# Altium PCB pcb.PcbDoc
Units mm, origin at the board's own origin, x right, y up, seen from the top; angles counter-clockwise.
Board outline 76.66 x 27.36 mm, 2 copper layers (Top Layer, Bottom Layer), stack 0.981 mm thick; 45 components, 12 nets, 110 pads, 470 vias.
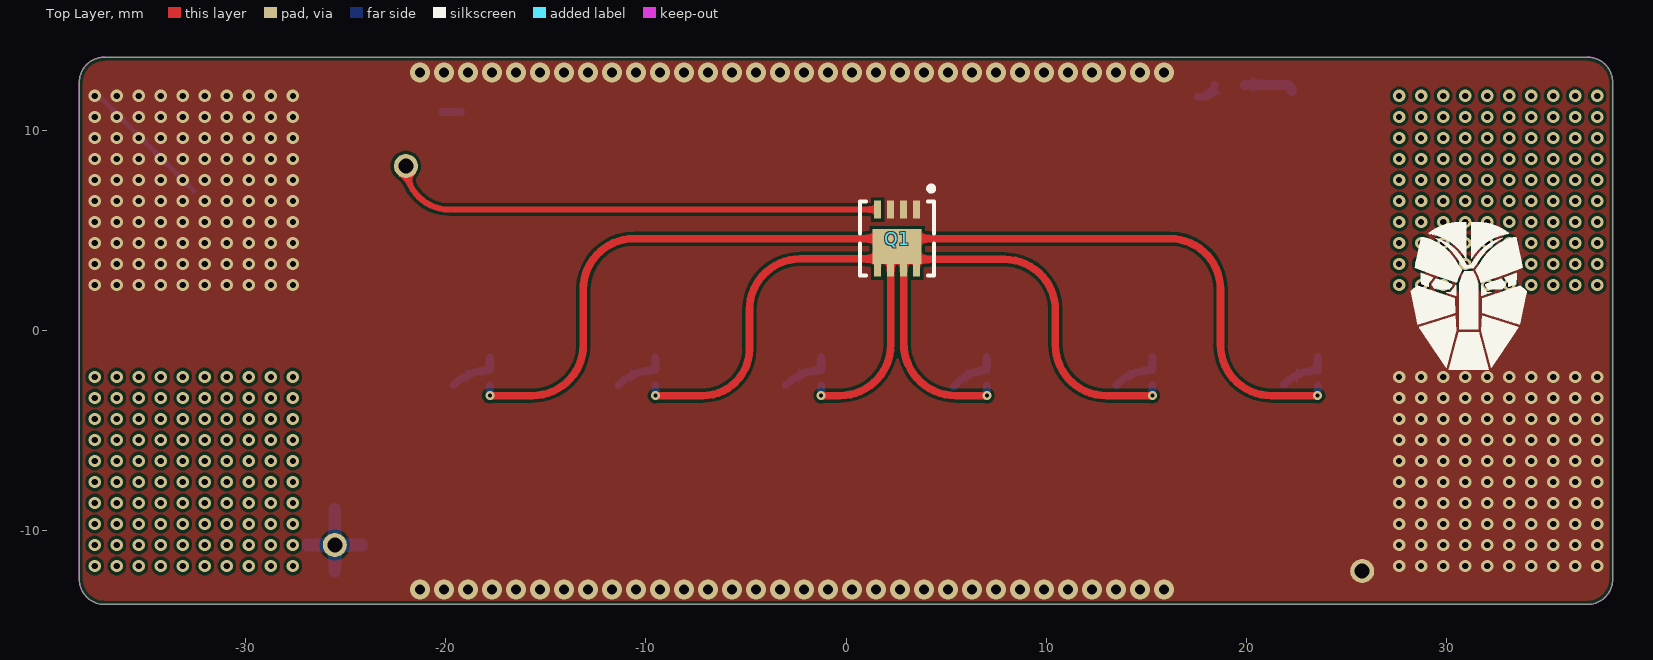
[diagram p0: Top Layer view]
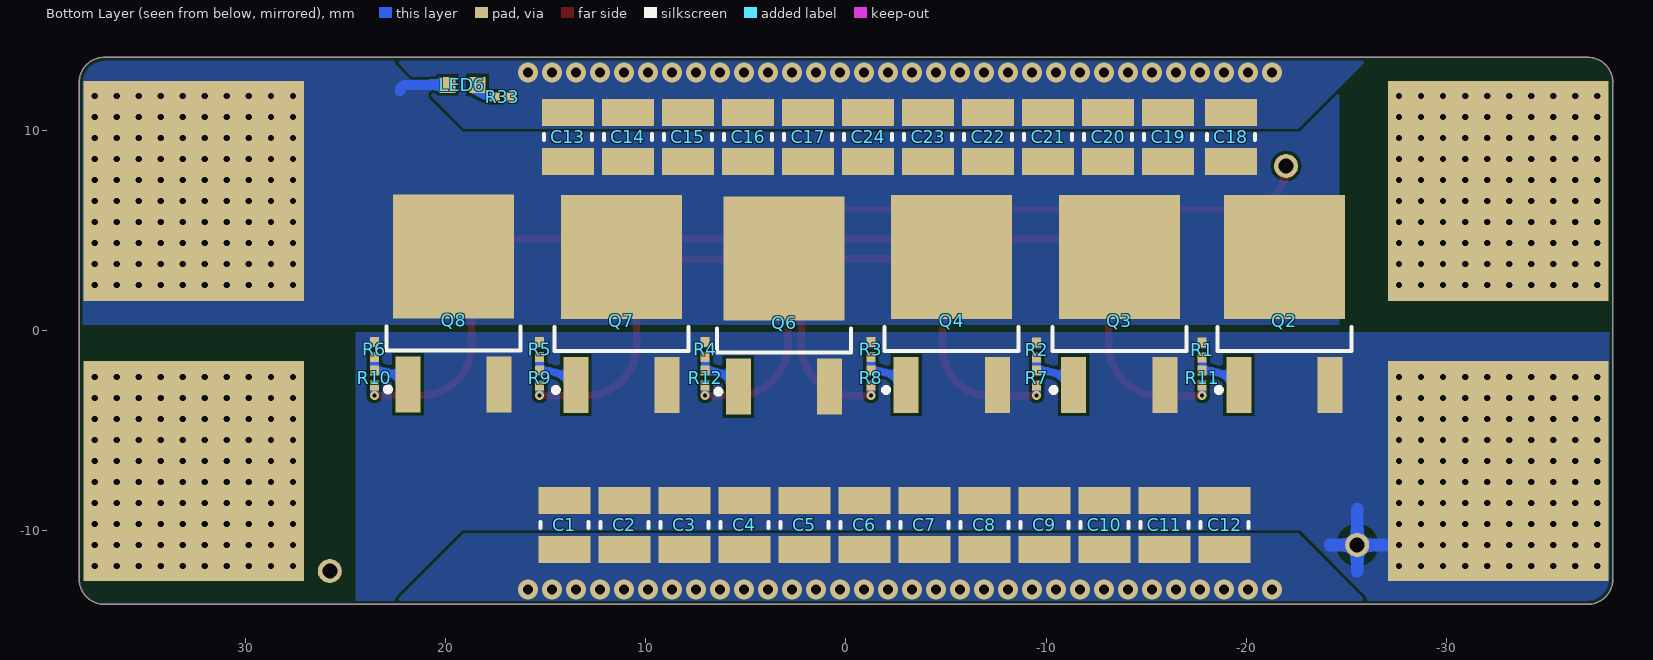
[diagram p1: Bottom Layer view, seen from below]
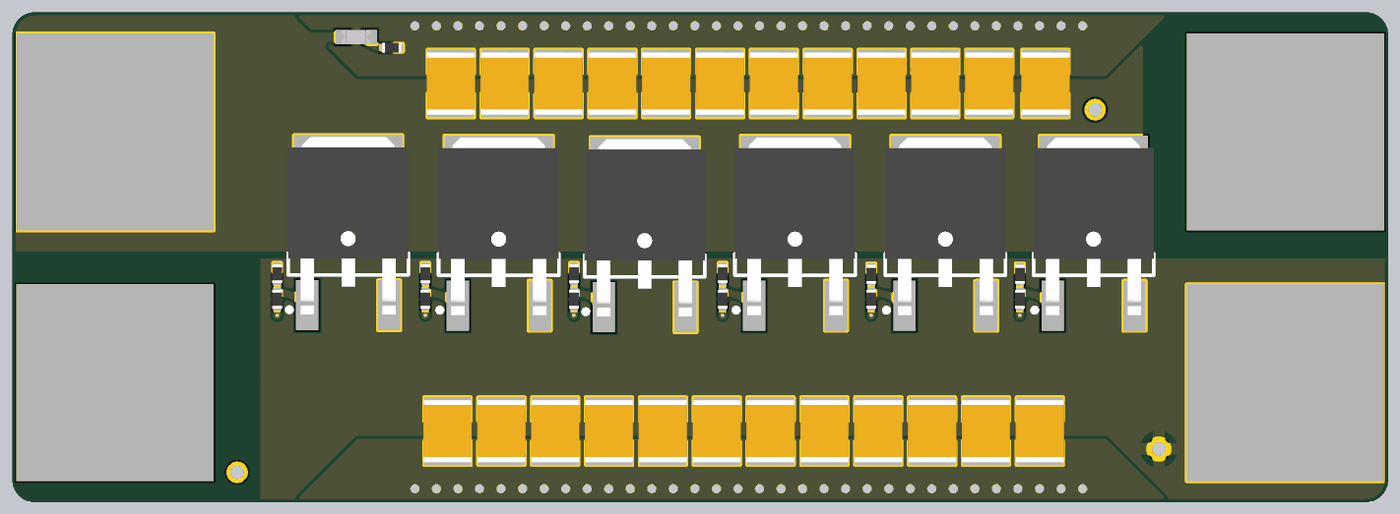
[diagram p2: 3D render of the assembled board from below, using the file's embedded part models]

## Layer stack, top to bottom
Top Solder: solder mask 0.0102, Solder Resist, Dk 3.5
Top Layer: signal copper 0.0356
Dielectric 1: dielectric 0.91, FR-4, Dk 4.8
Bottom Layer: signal copper 0.0356
Bottom Solder: solder mask 0.0102, Solder Resist, Dk 3.5

## Board outline
-38.329,-12.403 ccw(c-37.059,-12.403) -37.059,-13.673 37.058,-13.673 ccw(c37.058,-12.403) 38.328,-12.403 38.328,12.413 ccw(c37.058,12.413) 37.058,13.683 -37.059,13.683 ccw(c-37.059,12.413) -38.329,12.413

## Design rules (kind name [scope] priority, off if disabled: settings)
Clearance [All] p1: gap=0.152 ignorepadtopadclearanceinfootprint=FALSE except(0: Arc-Hole Track-Hole SMDPad-Hole THPad-Hole Via-Hole Fill-Hole Poly-Hole Region-Hole Text-Hole)
MinimumSolderMaskSliver [All] p1 off: minsoldermaskwidth=0.254
PolygonConnect [All] p1: connectstyle=Direct reliefconductorwidth=0.254 reliefentries=4 polygonreliefangle="90 Angle" airgapwidth=0.254
RoutingVias [All] p1: holewidth=0.711 width=1.27 viastyle="Through Hole" minholewidth=0.2 minwidth=0.45 maxholewidth=0.711 maxwidth=1.27
SilkToSilkClearance [All] p1 off: silktosilkclearance=0.254
SilkToSolderMaskClearance [IsPad] p1 off: minsilkscreentomaskgap=0.254 clearancetoexposedcopper=TRUE
SolderMaskExpansion [All] p1: expansion=0.102 istentingtop=FALSE
Width [All] p1: maxlimit=5.08 minlimit=0.152 preferedwidth=0.254 minimp=50.000000 maximp=50.000000 favimp=50.000000
27 further rules are at their usual default settings.

## Components (designator, comment, footprint, x,y, rotation, side; value= is the part's Value field where it differs from the comment)
C1 "22uF" C1210 14.081,-9.7 r90 bottom
C2 "22uF" C1210 11.081,-9.7 r90 bottom
C3 "22uF" C1210 8.081,-9.7 r90 bottom
C4 "22uF" C1210 5.081,-9.7 r90 bottom
C5 "22uF" C1210 2.081,-9.7 r90 bottom
C6 "22uF" C1210 -0.92,-9.7 r90 bottom
C7 "22uF" C1210 -3.919,-9.7 r90 bottom
C8 "22uF" C1210 -6.919,-9.7 r90 bottom
C9 "22uF" C1210 -9.92,-9.7 r90 bottom
C10 "22uF" C1210 -12.919,-9.7 r90 bottom
C11 "22uF" C1210 -15.919,-9.7 r90 bottom
C12 "22uF" C1210 -18.919,-9.7 r90 bottom
C13 "22uF" C1210 13.898,9.7 r270 bottom
C14 "22uF" C1210 10.898,9.7 r270 bottom
C15 "22uF" C1210 7.898,9.7 r270 bottom
C16 "22uF" C1210 4.898,9.7 r270 bottom
C17 "22uF" C1210 1.898,9.7 r270 bottom
C18 "22uF" C1210 -19.234,9.7 r270 bottom
C19 "22uF" C1210 -16.102,9.7 r270 bottom
C20 "22uF" C1210 -13.102,9.7 r270 bottom
C21 "22uF" C1210 -10.102,9.7 r270 bottom
C22 "22uF" C1210 -7.102,9.7 r270 bottom
C23 "22uF" C1210 -4.102,9.7 r270 bottom
C24 "22uF" C1210 -1.102,9.7 r270 bottom
LED6 "LED WHITE 0603" LED_0603 19.181,12.3 r0 bottom
Q1 "HP-MOS" VSON-8-NFET 2.56,4.615 r270 top
Q2 "High power mosfet" DPAK -21.915,1.45 r0 bottom
Q3 "High power mosfet" DPAK -13.66,1.45 r0 bottom
Q4 "High power mosfet" DPAK -5.283,1.45 r0 bottom
Q6 "High power mosfet" DPAK 3.099,1.364 r0 bottom
Q7 "High power mosfet" DPAK 11.227,1.45 r0 bottom
Q8 "High power mosfet" DPAK 19.614,1.476 r0 bottom
R1 "100k 0402" R0402 -17.806,-0.947 r270 bottom
R2 "100k 0402" R0402 -9.525,-0.947 r270 bottom
R3 "100k 0402" R0402 -1.245,-0.922 r270 bottom
R4 "100k 0402" R0402 7.036,-0.922 r270 bottom
R5 "100k 0402" R0402 15.316,-0.922 r270 bottom
R6 "100k 0402" R0402 23.571,-0.922 r270 bottom
R7 "10Ω 0402" R0402 -9.525,-2.344 r270 bottom
R8 "10Ω 0402" R0402 -1.245,-2.344 r270 bottom
R9 "10Ω 0402" R0402 15.316,-2.344 r270 bottom
R10 "10Ω 0402" R0402 23.571,-2.344 r270 bottom
R11 "10Ω 0402" R0402 -17.806,-2.344 r270 bottom
R12 "10Ω 0402" R0402 7.036,-2.344 r270 bottom
R33 "470" R0402 17.18,11.7 r180 bottom

## Footprints (in the part's own frame and the unit in brackets; to place one, negate y for a bottom-side part, rotate by r counter-clockwise, add the part's x,y. Pads: shape width x height; smd on the part's side, far side on the other; paste and mask are expansions set on the pad)
C1210 [mm] "Chip Capacitor, 2-Leads, Body 3.20x2.50mm, IPC High Density"
  rect 1.35x2.6 smd: 1(-1.225,0) 2(1.225,0)
  silkscreen extent -0.15,-1.2 0.15,1.2, body extent -1.75,-1.35 1.75,1.35, height 2.5
DPAK [mm]
  rect 1.25x2.8 smd: 1(2.28,4.15) 3(-2.28,4.15)
  rect 6.05x6.2 smd: 4(0,-2.25)
  silkscreen extent -3.35,1.25 3.41,4.52, body extent -3.35,-5.23 3.35,4.67, height 2.39
LED_0603 [mil]
  rect 31.5x31.5 smd: A(29.06,0) C(-30,0)
  body extent -32,-16 32,16, height 28
R0402 [mm] "Chip Resistor, 2-Leads, Body 1.00x0.50mm, IPC High Density"
  rect 0.5x0.45 smd: 1(-0.375,0) 2(0.375,0)
  body extent -0.52,-0.28 0.53,0.28, height 0.5
VSON-8-NFET [mm] "QFN, 8-Leads, Body 3.30x3.30mm, Pitch 0.65mm, IPC High Density"
  rect 1.75x2.45 smd: D(0.4,0)
  rect 0.9x0.35 smd: D(1.45,0.975) D(1.45,-0.325) D(1.45,0.325) D(1.45,-0.975) G(-1.45,-0.975) S(-1.45,0.975) S(-1.45,-0.325) S(-1.45,0.325)
  silkscreen extent -2.62,-1.85 1.85,1.85, body extent -1.75,-1.7 1.75,1.7, height 1.1

## Part data
C1 C2 C3 C4 C5 C6 C7 C8 C9 C10 C11 C12 C13 C14 C15 C16 C17 C18 C19 C20 C21 C22 C23 C24: library part C-22uF-1206, "22uF 1206", ComponentLink1Description=http://www1.futureelectronics.com/doc/SAMSUNG/CL05F104ZO5NNNC.pdf, ComponentLink1URL=http://www1.futureelectronics.com/doc/SAMSUNG/CL05F104ZO5NNNC.pdf, ComponentLink2Description=https://www.verical.com/server-webapp/html/getDatasheet?partID=358403, ComponentLink2URL=https://www.verical.com/server-webapp/html/getDatasheet?partID=358403, ComponentLink3Description=https://produktinfo.conrad.com/datenblaetter/450000-474999/458504-da-01-en-VS_KONDENSATOR_0402.pdf, ComponentLink3URL=https://produktinfo.conrad.com/datenblaetter/450000-474999/458504-da-01-en-VS_KONDENSATOR_0402.pdf, ComponentLink4Description=http://www.samsungsem.com/kr/support/product-search/mlcc/CL10A475MQ8NNNC.jsp?src-supplier=Digi-Key, ComponentLink4URL=http://www.samsungsem.com/kr/support/product-search/mlcc/CL10A475MQ8NNNC.jsp?src-supplier=Digi-Key, ComponentLink5Description=https://www.verical.com/server-webapp/html/getDatasheet?partID=358407&src-supplier=Verical, ComponentLink5URL=https://www.verical.com/server-webapp/html/getDatasheet?partID=358407&src-supplier=Verical, ComponentLink6Description=http://www1.futureelectronics.com/doc/SAMSUNG%20PASSIVE/CL05B104KQ5NNNC.pdf?src-supplier=Future+Electronics, ComponentLink6URL=http://www1.futureelectronics.com/doc/SAMSUNG%20PASSIVE/CL05B104KQ5NNNC.pdf?src-supplier=Future+Electronics
LED6: library part LED_ESML0603, "LED   Source: http://www.osram.convergy.de   Source: www.luxeon.com   Source: www.kingbright.com", Case Code (Imperial)=0603, Case Code (Metric)=1608, Color=Green, Forward Current=20mA, Forward Voltage=2V, Lens Color=Colorless,Clear, Manufacturer=Dialight, Manufacturer Part Number=5988070107F, Max Operating Temperature=100°C, Min Operating Temperature=-30°C, Package Quantity=4000, Power Dissipation=60mW, Reverse Voltage=5V, Supplier Part Number 1=350-2035-6-ND, Case/Package=0603, ComponentLink1Description=http://www.mouser.com/ds/2/109/SMT_selector_guide-267443.pdf?src-supplier=Mouser, ComponentLink1URL=http://www.mouser.com/ds/2/109/SMT_selector_guide-267443.pdf?src-supplier=Mouser, ComponentLink2Description=http://uk.rs-online.com/webdocs/0ae2/0900766b80ae2975.pdf?src-supplier=RSComponents, ComponentLink2URL=http://uk.rs-online.com/webdocs/0ae2/0900766b80ae2975.pdf?src-supplier=RSComponents, ComponentLink3Description=http://www.farnell.com/datasheets/1720200.pdf?src-supplier=Element14, ComponentLink3URL=http://www.farnell.com/datasheets/1720200.pdf?src-supplier=Element14, ComponentLink4Description=https://media.digikey.com/pdf/Data%20Sheets/Dialight%20PDFs/598_Series_0603_Pkg.pdf?src-supplier=Digi-Key, ComponentLink4URL=https://media.digikey.com/pdf/Data%20Sheets/Dialight%20PDFs/598_Series_0603_Pkg.pdf?src-supplier=Digi-Key, ComponentLink5Description=http://www.farnell.com/datasheets/1484480.pdf?src-supplier=Element14, ComponentLink5URL=http://www.farnell.com/datasheets/1484480.pdf?src-supplier=Element14, ComponentLink6Description=https://www.alliedelec.com/m/d/745256ca487aea7b70ea31e2d673d5bb.pdf?src-supplier=Allied+Electronics, ComponentLink6URL=https://www.alliedelec.com/m/d/745256ca487aea7b70ea31e2d673d5bb.pdf?src-supplier=Allied+Electronics, ComponentLink7Description=http://www.onlinecomponents.com/productFiles/mf-DIA/mdei5980603.pdf?src-supplier=Onlinecomponents.com, ComponentLink7URL=http://www.onlinecomponents.com/productFiles/mf-DIA/mdei5980603.pdf?src-supplier=Onlinecomponents.com, ComponentLink8Description=https://www.verical.com/server-webapp/html/getDatasheet?partID=146438&src-supplier=Verical, ComponentLink8URL=https://www.verical.com/server-webapp/html/getDatasheet?partID=146438&src-supplier=Verical, ComponentLink9Description=http://www.dialight.com/Assets/Brochures_And_Catalogs/Indication/SMT_selector_guide.pdf?src-supplier=Future+Electronics, ComponentLink9URL=http://www.dialight.com/Assets/Brochures_And_Catalogs/Indication/SMT_selector_guide.pdf?src-supplier=Future+Electronics, Depth=0.8mm, Description 1="DIALIGHT - 5988070107F - LED, 0603, GREEN, 20MCD, 566NM", Dominant Wavelength=568nm, Height=0.7mm, Illumination Color=Green, Lead Free="Lead Free", Length=1.6mm, Lens Size=0.8mm, Lens Style=Flat,Rectangular,Diffused,Colorless,Clear, Lens Transparency=Clear, Luminous Intensity=20mcd, Mount="Surface Mount", Number of Elements=1, Number of LEDs=1, Number of Pins=2, Packaging="Tape and Reel", Pricing="1=0.48, 10=0.346, 25=0.2652, 100=0.1731, 250=0.12692, 500=0.1077, 1000=0.08846 (USD)", Radiation Hardening=No, REACH SVHC="No SVHC", SPICEMODEL=NONE, SPICEPREFIX=D, SPICETYPE=diode, Stock=221494, Supplier 1=Digi-Key, Test Current=20mA, Viewing Angle=140°, Wavelength=570nm, Width=0.8mm
Q1: library part N-MOS, "Originally design used: CSD17577Q3A / Superior TI choice: CSD17579Q3A / Cheapest Option: AON7400B", Continuous Drain Current (ID)=40A, Drain to Source Voltage (Vdss)=30V, Input Capacitance=1.44nF, Manufacturer="Alpha & Omega Semiconductor", Manufacturer Part Number=AON7400B, Max Operating Temperature=150°C, Max Power Dissipation=4.1W, Min Operating Temperature=-55°C, Package Quantity=5000, Supplier Part Number 1=785-1677-6-ND, ComponentLink1Description=http://aosmd.com/res/data_sheets/AON7400B.pdf?src-supplier=Digi-Key, ComponentLink1URL=http://aosmd.com/res/data_sheets/AON7400B.pdf?src-supplier=Digi-Key, Description 1="MOSFET N-CH 30V 30A 8DFN", Mount="Surface Mount", Packaging="Tape and Reel", Pricing="1=0.53, 10=0.415, 100=0.2848, 500=0.19528, 1000=0.14647, 2500=0.13426 (USD)", Rds On Max=7.5mR, Stock=5413, Supplier 1=Digi-Key
Q2 Q3 Q4 Q6 Q7 Q8: library part P-MOS-DPAK
R1 R2 R3 R4 R5 R6: library part R-100k-0402
R7 R8 R9 R10 R11 R12: library part R-10-0402
R33: library part r0402, Case Code (Imperial)=0402, Case Code (Metric)=1005, Manufacturer=Yageo, Manufacturer Part Number=RC0402JR-07470RL, Max Operating Temperature=155°C, Max Power Dissipation=63mW, Min Operating Temperature=-55°C, Package Quantity=1, Power Rating=62.5mW, Resistance=470R, Supplier Part Number 1=311-470JRDKR-ND, Temperature Coefficient=100ppm/°C, Tolerance=5%, Voltage Rating=50V, Case/Package=0402, ComponentLink1Description=http://www.yageo.com/documents/recent/PYu-RC_Group_51_RoHS_L_10.pdf?src-supplier=Digi-Key, ComponentLink1URL=http://www.yageo.com/documents/recent/PYu-RC_Group_51_RoHS_L_10.pdf?src-supplier=Digi-Key, ComponentLink2Description=http://www.farnell.com/datasheets/1018594.pdf?src-supplier=Element14, ComponentLink2URL=http://www.farnell.com/datasheets/1018594.pdf?src-supplier=Element14, ComponentLink3Description=http://www.mouser.com/ds/2/447/PYu-RC0402_51_RoHS_L_6_r-8721.pdf?src-supplier=Mouser, ComponentLink3URL=http://www.mouser.com/ds/2/447/PYu-RC0402_51_RoHS_L_6_r-8721.pdf?src-supplier=Mouser, Composition="Thick Film", Depth=0.5mm, Description 1="RES SMD 470 OHM 5% 1/16W 0402", Features="Moisture Resistant", Height=0.016inch, Lead Free="Lead Free", Length=1mm, Military Standard=Not, Number of Terminations=2, Packaging="Tape and Reel", Pricing="1=0.1, 10=0.013, 100=0.0055, 1000=0.00245, 2500=0.00212, 5000=0.00176 (USD)", REACH SVHC=Unknown, Stock=2903670, Supplier 1=Digi-Key, Termination=SMD/SMT, Width=0.02inch, Working Voltage=50V

## Free pads (board coordinates)
  round 1.2 hole 0.75: EN_HP(-22,8.241) GND(25.8,-12) VBATT(-25.553,-10.7)
  rect 11x11 smd far side: GND_BATT(-32.6,7) GND_OUT(32.6,-7) V_BATT(-32.6,-7) V_OUT(32.6,7)

## Via types
v1: diameter 0.61, hole 0.305, Top Layer to Bottom Layer, tented both sides, 400 vias
v2: diameter 1, hole 0.5, Top Layer to Bottom Layer, tented both sides, 64 vias
v3: diameter 0.45, hole 0.2, Top Layer to Bottom Layer, tented both sides, 6 vias

## Nets (pads, with @x,y where several pads share a name; then routed paths per layer and width w, separated by ;. In a path a pad name is that pad's centre, name@x,y a point inside that pad or via, vN(x,y) a via of type N, cw(c..) or ccw(c..) an arc to the next point about the centre after c; other vN are vias at no path point)
EN_HP: pad.EN_HP Q1.G | length 24.8
  Top Layer w0.305: pad.EN_HP ccw(c-19.824,8.241) -19.824,6.065 Q1.G
GND: C1.1 C2.1 C3.1 C4.1 C5.1 C6.1 C7.1 C8.1 C9.1 C10.1 C11.1 C12.1 C13.1 C14.1 C15.1 C16.1 C17.1 C18.1 C19.1 C20.1 C21.1 C22.1 C23.1 C24.1 pad.GND pad.GND_BATT pad.GND_OUT Q1.S R33.2 | length 7.9
  Bottom Layer w0.254: pad.GND_BATT@-37.5,11.9 pad.GND_BATT
  Bottom Layer w0.381: C18.1@-20.202,10.942 C18.1@-19.234,10.942
  other v1: 27.65,-11.75 28.75,-11.75 29.85,-11.75 30.95,-11.75 32.05,-11.75 33.15,-11.75 34.25,-11.75 35.35,-11.75 36.45,-11.75 37.55,-11.75 27.65,-10.7 28.75,-10.7 29.85,-10.7 30.95,-10.7 32.05,-10.7 33.15,-10.7 34.25,-10.7 35.35,-10.7 36.45,-10.7 37.55,-10.7 27.65,-9.65 28.75,-9.65 29.85,-9.65 30.95,-9.65 32.05,-9.65 33.15,-9.65 34.25,-9.65 35.35,-9.65 36.45,-9.65 37.55,-9.65 27.65,-8.6 28.75,-8.6 29.85,-8.6 30.95,-8.6 32.05,-8.6 33.15,-8.6 34.25,-8.6 35.35,-8.6 36.45,-8.6 37.55,-8.6 27.65,-7.55 28.75,-7.55 29.85,-7.55 30.95,-7.55 32.05,-7.55 33.15,-7.55 34.25,-7.55 35.35,-7.55 36.45,-7.55 37.55,-7.55 27.65,-6.5 28.75,-6.5 29.85,-6.5 30.95,-6.5 32.05,-6.5 33.15,-6.5 34.25,-6.5 35.35,-6.5 36.45,-6.5 37.55,-6.5 27.65,-5.45 28.75,-5.45 29.85,-5.45 30.95,-5.45 32.05,-5.45 33.15,-5.45 34.25,-5.45 35.35,-5.45 36.45,-5.45 37.55,-5.45 27.65,-4.4 28.75,-4.4 29.85,-4.4 30.95,-4.4 32.05,-4.4 33.15,-4.4 34.25,-4.4 35.35,-4.4 36.45,-4.4 37.55,-4.4 27.65,-3.35 28.75,-3.35 29.85,-3.35 30.95,-3.35 32.05,-3.35 33.15,-3.35 34.25,-3.35 35.35,-3.35 36.45,-3.35 37.55,-3.35 27.65,-2.3 28.75,-2.3 29.85,-2.3 30.95,-2.3 32.05,-2.3 33.15,-2.3 34.25,-2.3 35.35,-2.3 36.45,-2.3 37.55,-2.3 -37.55,2.3 -36.45,2.3 -35.35,2.3 -34.25,2.3 -33.15,2.3 -32.05,2.3 -30.95,2.3 -29.85,2.3 -28.75,2.3 -27.65,2.3 -37.55,3.35 -36.45,3.35 -35.35,3.35 -34.25,3.35 -33.15,3.35 -32.05,3.35 -30.95,3.35 -29.85,3.35 -28.75,3.35 -27.65,3.35 -37.55,4.4 -36.45,4.4 -35.35,4.4 -34.25,4.4 -33.15,4.4 -32.05,4.4 -30.95,4.4 -29.85,4.4 -28.75,4.4 -27.65,4.4 -37.55,5.45 -36.45,5.45 -35.35,5.45 -34.25,5.45 -33.15,5.45 -32.05,5.45 -30.95,5.45 -29.85,5.45 -28.75,5.45 -27.65,5.45 -37.55,6.5 -36.45,6.5 -35.35,6.5 -34.25,6.5 -33.15,6.5 -32.05,6.5 -30.95,6.5 -29.85,6.5 -28.75,6.5 -27.65,6.5 -37.55,7.55 -36.45,7.55 -35.35,7.55 -34.25,7.55 -33.15,7.55 -32.05,7.55 -30.95,7.55 -29.85,7.55 -28.75,7.55 -27.65,7.55 -37.55,8.6 -36.45,8.6 -35.35,8.6 -34.25,8.6 -33.15,8.6 -32.05,8.6 -30.95,8.6 -29.85,8.6 -28.75,8.6 -27.65,8.6 -37.55,9.65 -36.45,9.65 -35.35,9.65 -34.25,9.65 -33.15,9.65 -32.05,9.65 -30.95,9.65 -29.85,9.65 -28.75,9.65 -27.65,9.65 -37.55,10.7 -36.45,10.7 -35.35,10.7 -34.25,10.7 -33.15,10.7 -32.05,10.7 -30.95,10.7 -29.85,10.7 -28.75,10.7 -27.65,10.7 -37.55,11.75 -36.45,11.75 -35.35,11.75 -34.25,11.75 -33.15,11.75 -32.05,11.75 -30.95,11.75 -29.85,11.75 -28.75,11.75 -27.65,11.75
  other v2: -21.302,-12.917 -20.102,-12.917 -18.902,-12.917 -17.702,-12.917 -16.502,-12.917 -15.302,-12.917 -14.102,-12.917 -12.902,-12.917 -11.702,-12.917 -10.502,-12.917 -9.302,-12.917 -8.102,-12.917 -6.902,-12.917 -5.702,-12.917 -4.502,-12.917 -3.302,-12.917 -2.102,-12.917 -0.902,-12.917 0.298,-12.917 1.498,-12.917 2.698,-12.917 3.898,-12.917 5.098,-12.917 6.298,-12.917 7.498,-12.917 8.698,-12.917 9.898,-12.917 11.098,-12.917 12.298,-12.917 13.498,-12.917 14.698,-12.917 15.898,-12.917 -21.302,12.917 -20.102,12.917 -18.902,12.917 -17.702,12.917 -16.502,12.917 -15.302,12.917 -14.102,12.917 -12.902,12.917 -11.702,12.917 -10.502,12.917 -9.302,12.917 -8.102,12.917 -6.902,12.917 -5.702,12.917 -4.502,12.917 -3.302,12.917 -2.102,12.917 -0.902,12.917 0.298,12.917 1.498,12.917 2.698,12.917 3.898,12.917 5.098,12.917 6.298,12.917 7.498,12.917 8.698,12.917 9.898,12.917 11.098,12.917 12.298,12.917 13.498,12.917 14.698,12.917 15.898,12.917
HP_OUT: C13.2 C14.2 C15.2 C16.2 C17.2 C18.2 C19.2 C20.2 C21.2 C22.2 C23.2 C24.2 LED6.A pad.V_OUT Q2.4 Q3.4 Q4.4 Q6.4 Q7.4 Q8.4 | length 2.5
  Bottom Layer w0.508: LED6.A 21.98,12.3 cw(c21.98,12) 22.28,12
  other v1: 27.65,2.3 28.75,2.3 29.85,2.3 30.95,2.3 32.05,2.3 33.15,2.3 34.25,2.3 35.35,2.3 36.45,2.3 37.55,2.3 27.65,3.35 28.75,3.35 29.85,3.35 30.95,3.35 32.05,3.35 33.15,3.35 34.25,3.35 35.35,3.35 36.45,3.35 37.55,3.35 27.65,4.4 28.75,4.4 29.85,4.4 30.95,4.4 32.05,4.4 33.15,4.4 34.25,4.4 35.35,4.4 36.45,4.4 37.55,4.4 27.65,5.45 28.75,5.45 29.85,5.45 30.95,5.45 32.05,5.45 33.15,5.45 34.25,5.45 35.35,5.45 36.45,5.45 37.55,5.45 27.65,6.5 28.75,6.5 29.85,6.5 30.95,6.5 32.05,6.5 33.15,6.5 34.25,6.5 35.35,6.5 36.45,6.5 37.55,6.5 27.65,7.55 28.75,7.55 29.85,7.55 30.95,7.55 32.05,7.55 33.15,7.55 34.25,7.55 35.35,7.55 36.45,7.55 37.55,7.55 27.65,8.6 28.75,8.6 29.85,8.6 30.95,8.6 32.05,8.6 33.15,8.6 34.25,8.6 35.35,8.6 36.45,8.6 37.55,8.6 27.65,9.65 28.75,9.65 29.85,9.65 30.95,9.65 32.05,9.65 33.15,9.65 34.25,9.65 35.35,9.65 36.45,9.65 37.55,9.65 27.65,10.7 28.75,10.7 29.85,10.7 30.95,10.7 32.05,10.7 33.15,10.7 34.25,10.7 35.35,10.7 36.45,10.7 37.55,10.7 27.65,11.75 28.75,11.75 29.85,11.75 30.95,11.75 32.05,11.75 33.15,11.75 34.25,11.75 35.35,11.75 36.45,11.75 37.55,11.75
NetLED6_C: LED6.C R33.1 | length 1.2
  Bottom Layer w0.381: R33.1@17.581,11.7 17.818,11.7 ccw(c17.818,12.3) LED6.C
NetQ1_D: Q1.D R7.2 R8.2 R9.2 R10.2 R11.2 R12.2 | length 108.8
  Top Layer w0.381: v3(-17.806,-3.233) -15.672,-3.233 ccw(c-15.672,-0.693) -13.132,-0.693 -13.132,2.075 cw(c-10.592,2.075) -10.592,4.615 2.158,4.615 Q1.D@2.56,4.213 ; v3(-9.525,-3.233) -7.163,-3.233 ccw(c-7.163,-0.897) -4.826,-0.897 -4.826,1.059 cw(c-2.286,1.059) -2.286,3.599 Q1.D@1.854,3.599 ; v3(-1.245,-3.233) -0.305,-3.233 ccw(c-0.305,-0.693) 2.235,-0.693 Q1.D@2.235,3.396 ; Q1.D@2.56,4.215 2.885,3.89 2.885,-0.632 ccw(c5.486,-0.632) 5.486,-3.233 v3(7.036,-3.233) ; Q1.D@2.56,4.615 16.18,4.615 cw(c16.18,2.075) 18.72,2.075 18.72,-0.693 ccw(c21.26,-0.693) 21.26,-3.233 v3(23.571,-3.233) ; Q1.D@2.895,3.574 7.925,3.574 cw(c7.925,1.034) 10.465,1.034 10.465,-0.693 ccw(c13.005,-0.693) 13.005,-3.233 v3(15.316,-3.233)
  Bottom Layer w0.381: v3(-17.806,-3.233) R11.2 ; v3(-9.525,-3.233) R7.2 ; v3(-1.245,-3.233) R8.2 ; v3(7.036,-3.233) R12.2 ; v3(15.316,-3.233) R9.2 ; v3(23.571,-3.233) R10.2
NetQ2_1: Q2.1 R1.2 R11.1 | length 2.7
  Bottom Layer w0.381: Q2.1@-19.634,-2.719 -19.628,-2.713 cw(c-17.832,-4.509) -17.832,-1.969 R11.1 R1.2
NetQ3_1: Q3.1 R2.2 R7.1 | length 2.7
  Bottom Layer w0.381: Q3.1 cw(c-9.615,-4.464) -9.615,-1.969 R7.1 R2.2
NetQ4_1: Q4.1 R3.2 R8.1 | length 2.6
  Bottom Layer w0.381: Q4.1 -2.999,-2.696 cw(c-1.245,-4.451) R8.1 R3.2
NetQ6_1: Q6.1 R4.2 R12.1 | length 2.6
  Bottom Layer w0.381: Q6.1 5.601,-2.563 cw(c7.036,-3.998) R12.1 R4.2
NetQ7_1: Q7.1 R5.2 R9.1 | length 2.7
  Bottom Layer w0.381: Q7.1 cw(c15.271,-4.464) 15.271,-1.969 R9.1 R5.2
NetQ8_1: Q8.1 R6.2 R10.1 | length 2.6
  Bottom Layer w0.381: Q8.1 21.912,-2.657 cw(c23.571,-4.316) R10.1 ; R6.2 R10.1 ; R10.1@23.596,-2.014 cw(c23.596,-1.989) 23.571,-1.989 R10.1
V_HV_BATT: C1.2 C2.2 C3.2 C4.2 C5.2 C6.2 C7.2 C8.2 C9.2 C10.2 C11.2 C12.2 pad.V_BATT pad.VBATT Q2.3 Q3.3 Q4.3 Q6.3 Q7.3 Q8.3 R1.1 R2.1 R3.1 R4.1 R5.1 R6.1 | length 5.8
  Bottom Layer w0.635: -26.9,-10.7 pad.VBATT ; -25.553,-12.015 pad.VBATT ; -25.553,-8.925 pad.VBATT ; -24.206,-10.7 pad.VBATT
  other v1: -37.55,-11.75 -36.45,-11.75 -35.35,-11.75 -34.25,-11.75 -33.15,-11.75 -32.05,-11.75 -30.95,-11.75 -29.85,-11.75 -28.75,-11.75 -27.65,-11.75 -37.55,-10.7 -36.45,-10.7 -35.35,-10.7 -34.25,-10.7 -33.15,-10.7 -32.05,-10.7 -30.95,-10.7 -29.85,-10.7 -28.75,-10.7 -27.65,-10.7 -37.55,-9.65 -36.45,-9.65 -35.35,-9.65 -34.25,-9.65 -33.15,-9.65 -32.05,-9.65 -30.95,-9.65 -29.85,-9.65 -28.75,-9.65 -27.65,-9.65 -37.55,-8.6 -36.45,-8.6 -35.35,-8.6 -34.25,-8.6 -33.15,-8.6 -32.05,-8.6 -30.95,-8.6 -29.85,-8.6 -28.75,-8.6 -27.65,-8.6 -37.55,-7.55 -36.45,-7.55 -35.35,-7.55 -34.25,-7.55 -33.15,-7.55 -32.05,-7.55 -30.95,-7.55 -29.85,-7.55 -28.75,-7.55 -27.65,-7.55 -37.55,-6.5 -36.45,-6.5 -35.35,-6.5 -34.25,-6.5 -33.15,-6.5 -32.05,-6.5 -30.95,-6.5 -29.85,-6.5 -28.75,-6.5 -27.65,-6.5 -37.55,-5.45 -36.45,-5.45 -35.35,-5.45 -34.25,-5.45 -33.15,-5.45 -32.05,-5.45 -30.95,-5.45 -29.85,-5.45 -28.75,-5.45 -27.65,-5.45 -37.55,-4.4 -36.45,-4.4 -35.35,-4.4 -34.25,-4.4 -33.15,-4.4 -32.05,-4.4 -30.95,-4.4 -29.85,-4.4 -28.75,-4.4 -27.65,-4.4 -37.55,-3.35 -36.45,-3.35 -35.35,-3.35 -34.25,-3.35 -33.15,-3.35 -32.05,-3.35 -30.95,-3.35 -29.85,-3.35 -28.75,-3.35 -27.65,-3.35 -37.55,-2.3 -36.45,-2.3 -35.35,-2.3 -34.25,-2.3 -33.15,-2.3 -32.05,-2.3 -30.95,-2.3 -29.85,-2.3 -28.75,-2.3 -27.65,-2.3

## Polygon pours and split planes (outlines as drawn)
HP_OUT on Bottom Layer "NONET_L-01_P-001" (solid, remove dead copper, pour order 8): -24.659,0.316 38.328,0.316 38.328,13.683 -24.659,13.683
GND on Bottom Layer "NONET_L-01_P-001" (solid, remove dead copper, pour order 1): -28.503,16.017 -22.603,10.117 19.097,10.117 24.998,16.017
GND on Bottom Layer "NONET_L-01_P-001" (solid, remove dead copper, pour order 0): -28.503,-16.017 -22.603,-10.117 19.097,-10.117 24.998,-16.017
V_HV_BATT on Bottom Layer "NONET_L-01_P-001" (solid, remove dead copper, pour order 6): -38.297,-13.64 24.511,-13.64 24.511,-0.058 -38.297,-0.058
GND on Top Layer "NONET_L-01_P-001" (solid, remove dead copper, pour order 2): -45.238,18.026 -45.238,-22.715 44.882,-22.715 44.882,18.026

## Keep-outs
Keep-Out Layer:
  lines w0.051: -38.329,-12.403 ccw(c-37.059,-12.403) -37.059,-13.673 37.058,-13.673 ccw(c37.058,-12.403) 38.328,-12.403 38.328,12.413 ccw(c37.058,12.413) 37.058,13.683 4.013,13.683 -37.059,13.683 ccw(c-37.059,12.413) -38.329,12.413 -38.329,-12.403

## Other copper
Bottom Layer:
  pour cut-out: -25.553,-9.65 cw(c-25.552,-10.7) -24.502,-10.7 cw(c-25.552,-10.7) -25.553,-11.75 cw(c-25.552,-10.7) -26.602,-10.7 cw(c-25.553,-10.7)

## Silkscreen, mask and mechanical layers (free items; w line width, h text height)
Top Overlay:
  drawing of 17 lines, arcs and shapes, not listed